# EAGLE board Arduino-DRA818V-TX (EAGLE 7.7.0)
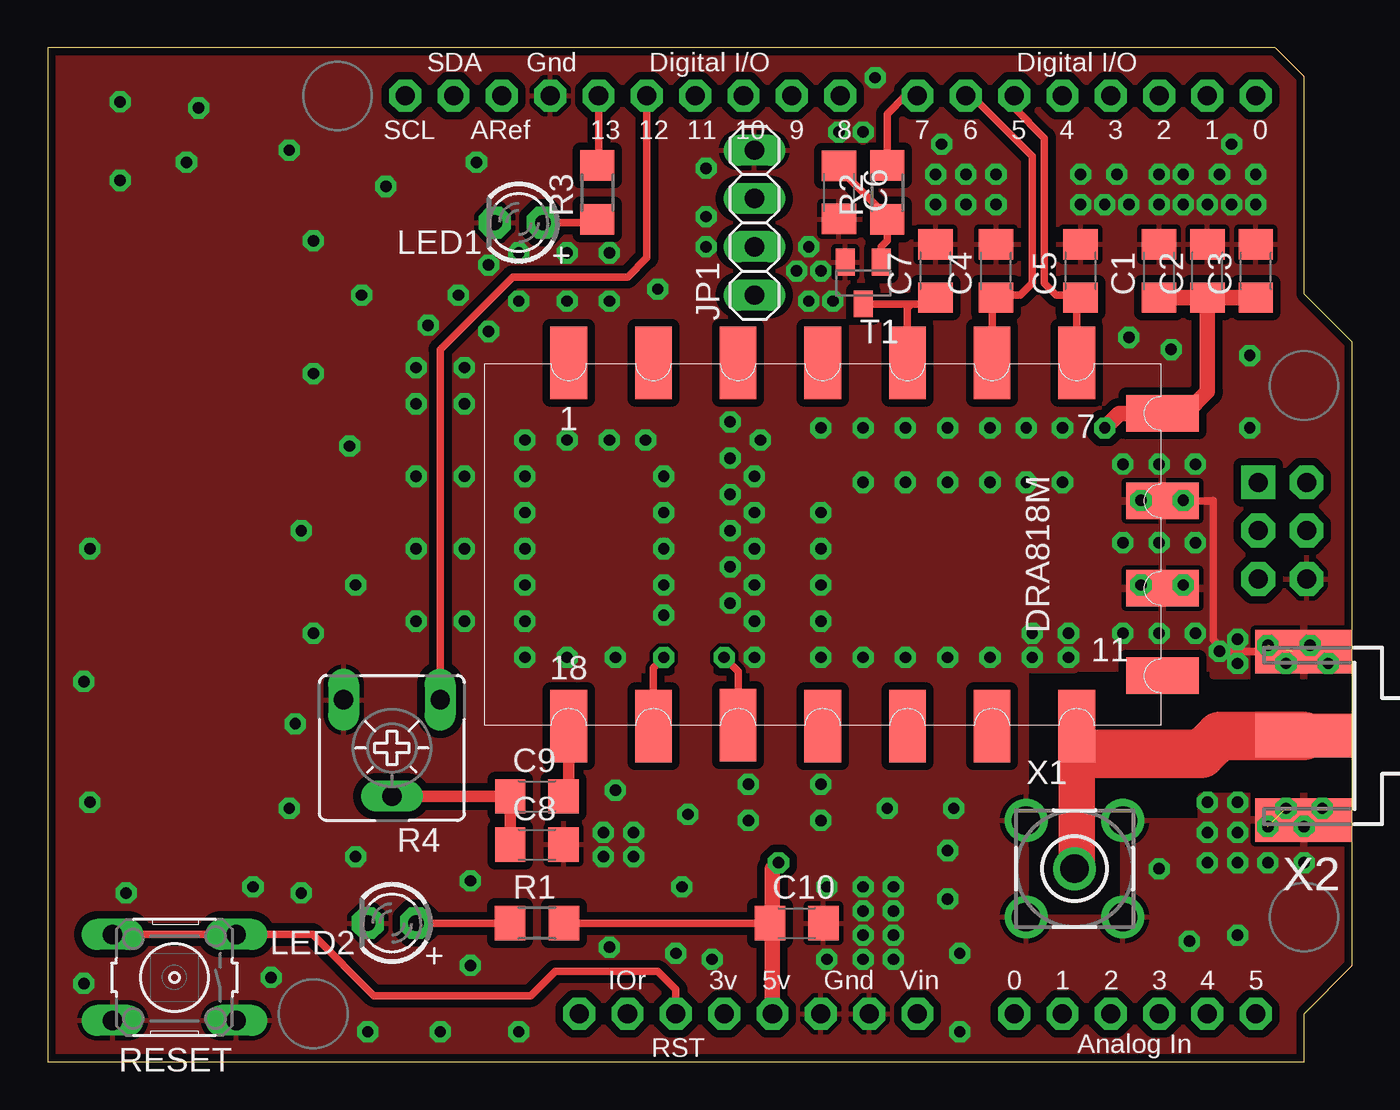
[diagram p0: board, top side]
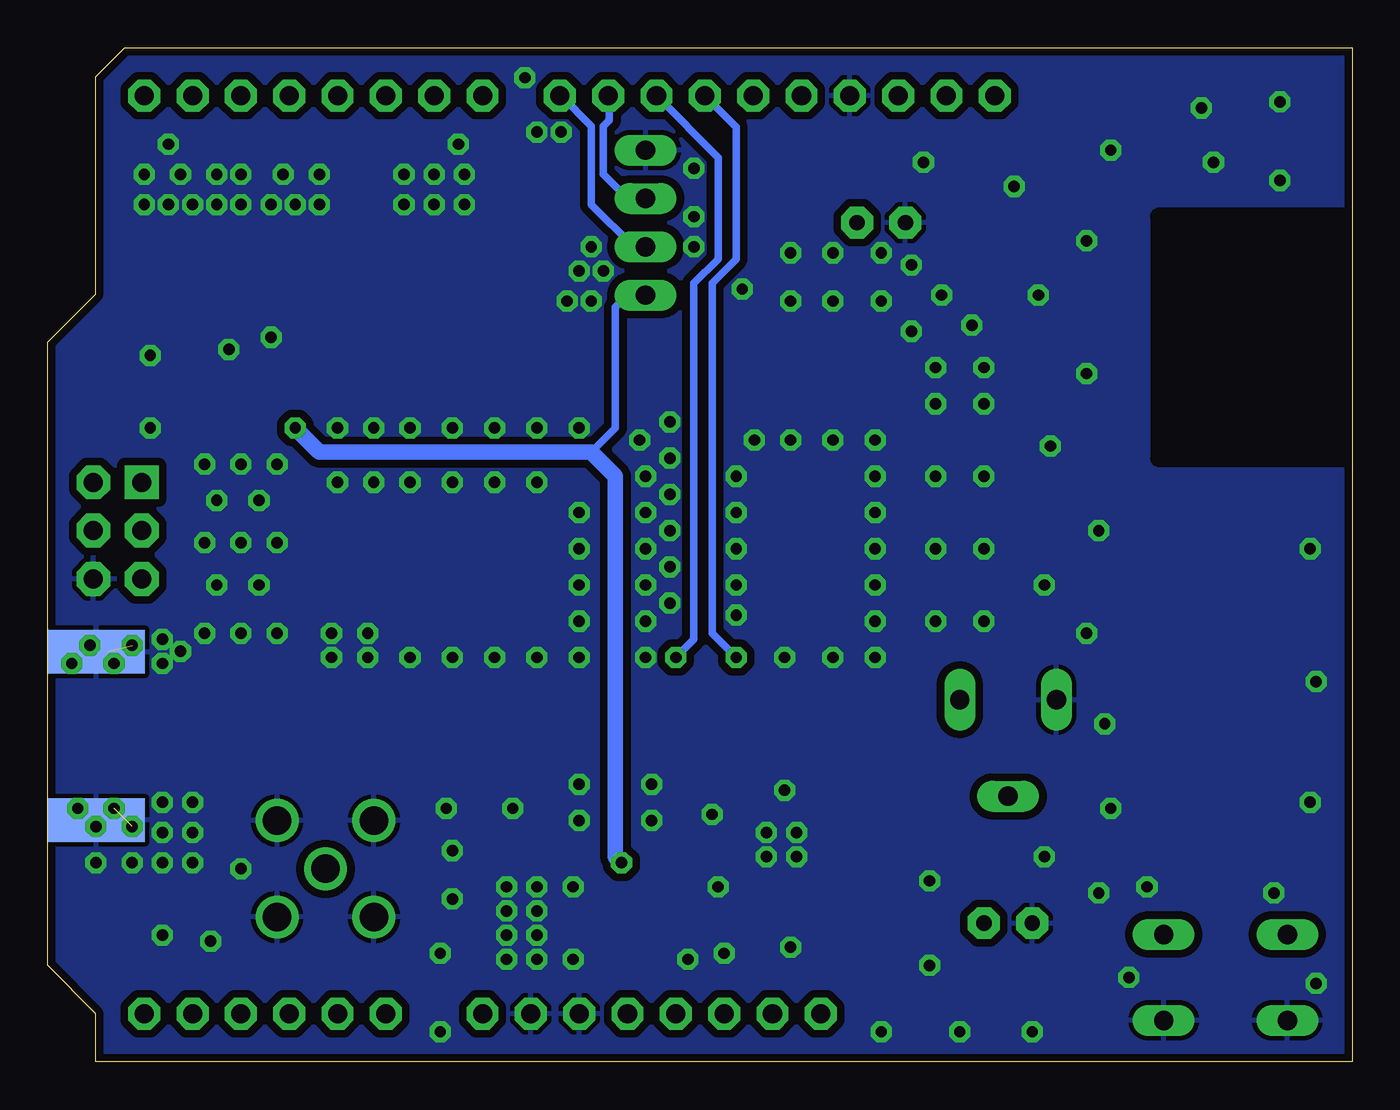
[diagram p1: board, bottom side, seen from below]

Size 68.58 x 53.34 mm. Coordinates in mm from the lower left corner, seen from the top.
Copper layers (1*16): Top 0.035mm / dielectric 1.5mm / Bottom 0.035mm
Design rules "SparkFun": minimum track width 8mil, minimum drill 20mil, track to track 8mil, track to pad 8mil, pad to pad 8mil, via to via 8mil, smd to smd 8mil, copper to edge 10mil, drill to drill 8mil, minimum pad ring 12mil, minimum via ring 10mil, stop-mask expansion 4mil, vias tented up to drill 25mil, thermal gap 10mil

## Footprints (pad centres in the part's own frame; a part is rotated, then mirrored left to right if it is on the bottom)
C1206 = smd 1.6 x 1.8: 1 -1.4,0; 2 1.4,0
DRA818A = smd 3.81 x 1.93: 1 -9.45,-13.25; 2 -9.45,-8.8; 3 -9.45,-4.35; 4 -9.45,0.1; 5 -9.45,4.55; 6 -9.45,9; 7 -9.45,13.45; 12 9.65,13.45; 13 9.65,9; 14 9.65,4.55; 15 9.65,0.1; 16 9.6,-4.35; 17 9.65,-8.8; 18 9.65,-13.25 | smd 1.93 x 3.81: 8 -6.8,17.95; 9 -2.2,17.95; 10 2.4,17.95; 11 7,17.95
1X04 = drill 1.016 long: 1 -3.81,0; 2 -1.27,0; 3 1.27,0; 4 3.81,0
LED3MM = drill 0.813 pad 1.676 octagon: A -1.27,0; K 1.27,0
ARDUINOR3_ICSP = drill 1 pad 1.676 octagon: 3V 35.56,2.54; 5V 38.1,2.54; A0 50.8,2.54; A1 53.34,2.54; A2 55.88,2.54; A3 58.42,2.54; A4 60.96,2.54; A5 63.5,2.54; AREF 23.876,50.8; D0 63.5,50.8; D1 60.96,50.8; D2 58.42,50.8; D3 55.88,50.8; D4 53.34,50.8; D5 50.8,50.8; D6 48.26,50.8; D7 45.72,50.8; D8 41.656,50.8; D9 39.116,50.8; D10 36.576,50.8; D11 34.036,50.8; D12 31.496,50.8; D13 28.956,50.8; GND 26.416,50.8; GND@1 43.18,2.54; GND@2 40.64,2.54; IOREF 30.48,2.54; RESERVED 27.94,2.54; RESET 33.02,2.54; SCL 18.796,50.8; SDA 21.336,50.8; VIN 45.72,2.54 | drill 1 pad 1.778 octagon: 5V_ICSP 66.167,30.48; GND@3 66.167,25.4; MOSI 66.167,27.94; RESET_ICSP 63.627,25.4; SCK 63.627,27.94 | drill 1 pad 1.778 square: MISO 63.627,30.48
R1206 = smd 1.6 x 1.803: 1 -1.422,0; 2 1.422,0
CA6V = drill 1.016 long: A -2.54,-2.54; E 2.54,-2.54; S 0,2.54
B3F-10XX = drill 1.016 long: 1 -3.251,2.261; 2 3.251,2.261; 3 -3.251,-2.261; 4 3.251,-2.261
SOT23-BEC = smd 1 x 1.4: B -0.95,-1.1; C 0,1.1; E 0.95,-1.1
LTI-SASF54GT = drill 1.5 pad 2.2: 1 0,0; 2 -2.54,2.54; 3 2.54,2.54; 4 2.54,-2.54; 5 -2.54,-2.54
J502-ND-142-0701-801/806 = smd 5.08 x 2.286: 1 2.565,0; G@1 2.565,4.42; G@2 2.565,-4.42 | smd 5.08 x 2.286 bottom: G@3 2.565,4.42; G@4 2.565,-4.42

## Placement (x,y rotation side)
C1  1n  [C1206]  58.42,41.59 90 top
C2  10n  [C1206]  60.96,41.59 90 top
C3  1u  [C1206]  63.5,41.59 90 top
C4  100n  [C1206]  49.85,41.59 90 top
C5  100n  [C1206]  54.29,41.59 90 top
C6  100n  [C1206]  41.59,45.72 270 top
C7  100n  [C1206]  46.67,41.59 90 top
C8  100n  [C1206]  25.72,11.43 0 top
C9  1u  [C1206]  25.72,13.97 0 top
C10  1n  [C1206]  39.37,7.3 0 top
DRA818V  [DRA818A]  40.64,27.3 270 top
JP1  [1X04]  37.15,44.13 90 top
LED1  [LED3MM]  24.76,44.13 180 top
LED2  [LED3MM]  18.1,7.3 180 top
M1  ARDUINO_R3_ICSP  [ARDUINOR3_ICSP]  0,0 0 top
R1  560  [R1206]  25.72,7.3 0 top
R2  1k  [R1206]  44.13,45.72 90 top
R3  560  [R1206]  28.89,45.72 90 top
R4  10k  [CA6V]  18.1,16.51 180 top
RESET  Reset  [B3F-10XX]  6.67,4.45 180 top
T1  [SOT23-BEC]  42.86,40.96 180 top
X1  SMA  [LTI-SASF54GT]  53.97,10.16 0 top
X2  SMA  [J502-ND-142-0701-801/806]  68.58,17.15 180 top

## Library data of the parts
C1-C10 R1-R3 = resistor
DRA818V = dorji
JP1 = pinhead
LED1 LED2 M1 = adafruit
R4 = pot
RESET = switch-omron; MPN: B3F-1000; OC_FARNELL: 176432; OC_NEWARK: 36M3542
T1 = transistor
X1 = con-coax; OC_FARNELL: unknown; OC_NEWARK: unknown
X2 = con-coax; MF: JOHNSON COMPONENTS; MPN: 142-0701-801; OC_FARNELL: 1608592; OC_NEWARK: 90F2624

## Nets
3V: M1.3V
+5V: C1.1 C2.1 C3.1 C10.1 DRA818V.8 JP1.1 M1.5V R1.2
AF_NORM: C9.2 DRA818V.18
AF_OUT: M1.D12 R4.A
GND: C1.2 C2.2 C3.2 C4.2 C5.2 C6.2 C7.2 C8.2 C10.2 DRA818V.9 DRA818V.10 JP1.4 LED1.K LED2.K M1.GND M1.GND@1 M1.GND@2 M1.GND@3 R4.E RESET.1 RESET.2 T1.E X1.2 X1.3 X1.4 X1.5 X2.G@1 X2.G@2 X2.G@3 X2.G@4
LED_BUILTIN: M1.D13 R3.2
N$5: DRA818V.12 X1.1 X2.1
N$7: C6.1 R2.1 T1.B
N$8: LED1.A R3.1
N$9: C8.1 C9.1 R4.S
N$41: LED2.A R1.1
PD: C4.1 DRA818V.6 M1.D6
POW: C5.1 DRA818V.7 M1.D5
PTT: M1.D7 R2.2
PTT_SW: C7.1 DRA818V.5 T1.C
RESET: M1.RESET RESET.3 RESET.4
RXD_DRJ: DRA818V.16 M1.D10
RXD_GPS: JP1.2 M1.D8
TXD_DRJ: DRA818V.17 M1.D11
TXD_GPS: JP1.3 M1.D9
VIN: M1.VIN

## Tracks (layer width: path | path; a pad name or v marks a point on that pad's centre or on a via)
+5V  (via drill 0.6)
  Top 0.406: R1.2 C10.1
  Top 0.813: M1.5V 38.1,7.17 C10.1 38.1,7.43 38.1,10.16 v38.42,10.48 | C2.1 60.96,35.24 59.82,34.11 DRA818V.8 56.33,34.11 v55.56,33.34 | C3.1 C2.1 | C1.1 C2.1
  Bottom 0.406: JP1.1 38.1,40.32 38.73,39.69 38.73,33.34 40,32.07
  Bottom 0.813: v55.56,33.34 54.29,32.07 40,32.07 38.73,30.8 38.73,10.8 v38.42,10.48
AF_NORM
  Top 0.61: DRA818V.18 27.39,14.24 C9.2
AF_OUT
  Top 0.406: M1.D12 31.5,42.29 30.48,41.28 24.45,41.28 20.64,37.47 R4.A
GND  (via drill 0.6)  (2 unrouted)
  Top 0.406: DRA818V.9 61.25,29.51 61.28,29.53 61.28,22.23 61.91,21.59 65.41,21.59 65.72,21.91 v66.36,21.91 v67.31,20.95
  other vias: 62.55,22.23 62.55,20.95 64.13,21.91 65.09,20.95 64.13,12.38 65.09,13.34 66.04,12.38 66.99,13.34 25.08,21.27 25.08,23.18 25.08,25.08 25.08,26.99 25.08,28.89 25.08,30.8 25.08,32.7 27.3,32.7 29.53,32.7 31.43,32.7 37.47,32.7 35.88,33.66 40.64,33.34 42.86,33.34 45.08,33.34 49.53,33.34 53.34,33.34 51.44,33.34 47.31,33.34 27.3,21.27 29.85,21.27 37.15,30.8 37.15,28.89 37.15,26.99 37.15,25.08 37.15,23.18 37.15,21.27 40.64,21.27 45.08,21.27 49.53,21.27 53.66,21.27 58.42,22.54 58.42,27.3 60.33,27.3 60.33,22.54 56.52,22.54 56.52,27.3 56.52,31.43 58.42,31.43 60.33,31.43 51.75,21.27 47.31,21.27 42.86,21.27 40.64,23.18 40.64,25.08 40.64,26.99 40.64,28.89 42.86,30.48 45.08,30.48 47.31,30.48 49.53,30.48 51.44,30.48 53.34,30.48 53.66,22.54 51.75,22.54 57.47,25.08 59.69,25.08 57.47,29.53 59.69,29.53 62.55,13.65 62.55,12.06 60.96,13.65 60.96,12.06 60.96,10.48 62.55,10.48 64.13,10.48 66.04,10.48 61.59,21.59 63.5,45.08 60.96,45.08 58.42,45.08 62.23,45.08 59.69,45.08 54.29,45.08 55.56,45.08 56.83,45.08 49.85,45.08 46.67,45.08 48.26,45.08 42.86,7.94 42.86,6.67 29.21,10.8 30.8,12.06 29.21,12.06 21.91,23.18 19.37,23.18 21.91,26.99 19.37,26.99 21.91,30.8 19.37,30.8 21.91,34.61 19.37,34.61 21.91,36.51 19.37,36.51 20,38.73 23.18,41.91 21.59,40.32 23.18,38.42 24.76,40 24.76,42.55 27.3,42.55 27.3,40 29.53,40 29.53,42.55 46.67,46.67 48.26,46.67 49.85,46.67 54.29,46.67 56.2,46.67 63.5,46.67 59.69,46.67 61.59,46.67 58.42,46.67 30.8,10.8 36.83,14.6 36.83,12.7 40.64,12.7 40.64,14.6 40.96,9.21 40.96,5.4 42.86,5.4 44.45,5.4 44.45,6.67 44.45,7.94 44.45,9.21 42.86,9.21 35.88,31.75 35.88,29.84 35.88,27.94 35.88,26.03 35.88,24.13 32.39,30.8 32.39,28.89 32.39,26.99 32.39,25.08 32.39,23.49 41.59,48.89 42.86,48.89 40,42.86 39.37,41.59 40,40 40.64,41.59 41.28,40 34.61,46.99 34.61,44.45 34.61,42.86 32.07,40.64 3.81,50.48 3.81,46.36 7.3,47.31 7.94,50.17 12.7,47.94 13.97,43.18 17.78,46.04 22.54,47.31 16.51,40.32 13.97,36.19 15.88,32.39 13.34,27.94 16.19,25.08 2.22,26.99 1.91,20 2.22,13.65 4.13,8.89 13.34,8.89 12.7,13.34 13.02,17.78 13.97,22.54 16.19,10.8 22.22,9.52 29.85,14.29 33.34,9.21 33.66,13.02 44.13,13.34 47.31,11.11 47.94,5.72 60.01,6.35 58.42,10.16 62.55,6.67 56.83,38.1 59.05,37.47 63.18,33.34 63.18,37.15 43.5,51.75 46.99,48.26 62.23,48.26 16.83,1.59 20.64,1.59 24.76,1.59 47.94,1.59 11.75,4.45 1.91,4.13 10.79,9.21 22.22,5.08 34.92,5.4 29.53,6.03 33.02,5.72 47.31,8.57 47.62,13.34
  pour Bottom (isolate 0.406): 0.32,53.02 64.45,53.02 65.72,51.75 65.72,40.32 68.26,37.78 68.26,5.4 65.72,2.86 65.72,0.32 0.32,0.32
  pour Top: 24.45,33.66 53.97,33.66 53.97,31.75 61.59,31.75 61.59,22.86 68.26,22.86 68.26,20.32 61.28,20.32 61.28,21.91 53.97,21.91 53.97,20.64 24.45,20.64
  pour Top: 60.64,13.97 67.94,13.97 67.94,9.84 60.64,9.84
  pour Top (isolate 0.406): 0.32,53.02 64.45,53.02 65.72,51.75 65.72,40.32 68.26,37.78 68.26,20.64 51.44,20.64 51.44,7.62 56.52,7.62 56.52,12.7 68.26,12.7 68.26,5.4 65.72,2.86 65.72,0.32 0.32,0.32
LED_BUILTIN
  Top 0.406: M1.D13 28.96,47.21 R3.2
N$5
  Top 1.93: DRA818V.12 54.09,16.19 | 54.09,16.19 54.09,10.27 X1.1 | 55.24,16.19 54.09,16.19
  Top 2.54: X2.1 61.59,17.15 60.64,16.19 55.24,16.19
N$7
  Top 0.406: C6.1 41.59,46.99 43.81,44.77 43.81,44.61 R2.1 44.13,43.18 43.81,42.86 T1.B
N$8
  Top 0.406: LED1.A 28.73,44.13 R3.1
N$9
  Top 0.61: R4.S C9.1 C8.1
N$41
  Top 0.406: LED2.A R1.1
PD
  Top 0.406: M1.D6 48.58,50.8 51.75,47.62 51.75,40.96 51.12,40.32 49.98,40.32 C4.1 49.64,39.98 DRA818V.6
POW
  Top 0.406: M1.D5 50.8,50.17 52.39,48.58 52.39,40.96 53.02,40.32 54.16,40.32 C5.1 54.09,39.99 DRA818V.7
PTT
  Top 0.406: M1.D7 45.08,50.8 44.13,49.85 R2.2
PTT_SW
  Top 0.406: T1.C 45.4,39.86 | 45.4,39.86 46.34,39.86 C7.1 | DRA818V.5 45.19,39.64 45.4,39.86
RESET
  Top 0.406: RESET.4 RESET.3 13.93,6.71 17.14,3.49 25.4,3.49 26.67,4.76 32.07,4.76 33.02,3.81 M1.RESET
RXD_DRJ  (via drill 0.6)
  Top 0.406: DRA818V.16 36.29,20.54 v35.56,21.27
  Bottom 0.406: v35.56,21.27 34.61,22.23 34.61,40.96 33.34,42.23 33.34,47.56 M1.D10
RXD_GPS
  Bottom 0.406: M1.D8 41.59,50.8 40,49.21 40,45.08 37.78,42.86 JP1.2
TXD_DRJ  (via drill 0.6)
  Top 0.406: DRA818V.17 31.84,20.73 v32.39,21.27
  Bottom 0.406: v32.39,21.27 33.66,22.54 33.66,40.96 32.39,42.23 32.39,49.15 M1.D11
TXD_GPS
  Bottom 0.406: JP1.3 38.1,45.4 39.37,46.67 39.37,49.21 39.05,49.53 39.05,50.74 M1.D9

## Text on the board
tStop: ARDUINO TX-818V SHIELD | HANDIKO - YD1SDL | www.github.com/handiko